# Altium PCB BiasTee.PcbDoc
Units mil, origin at the board's own origin, x right, y up, seen from the top; angles counter-clockwise.
Board outline 2065 x 2450 mil, 2 copper layers (Top Layer, Bottom Layer); 22 components, 12 nets, 58 pads, 225 vias.
Unrouted connection lines stored in the file: 2.
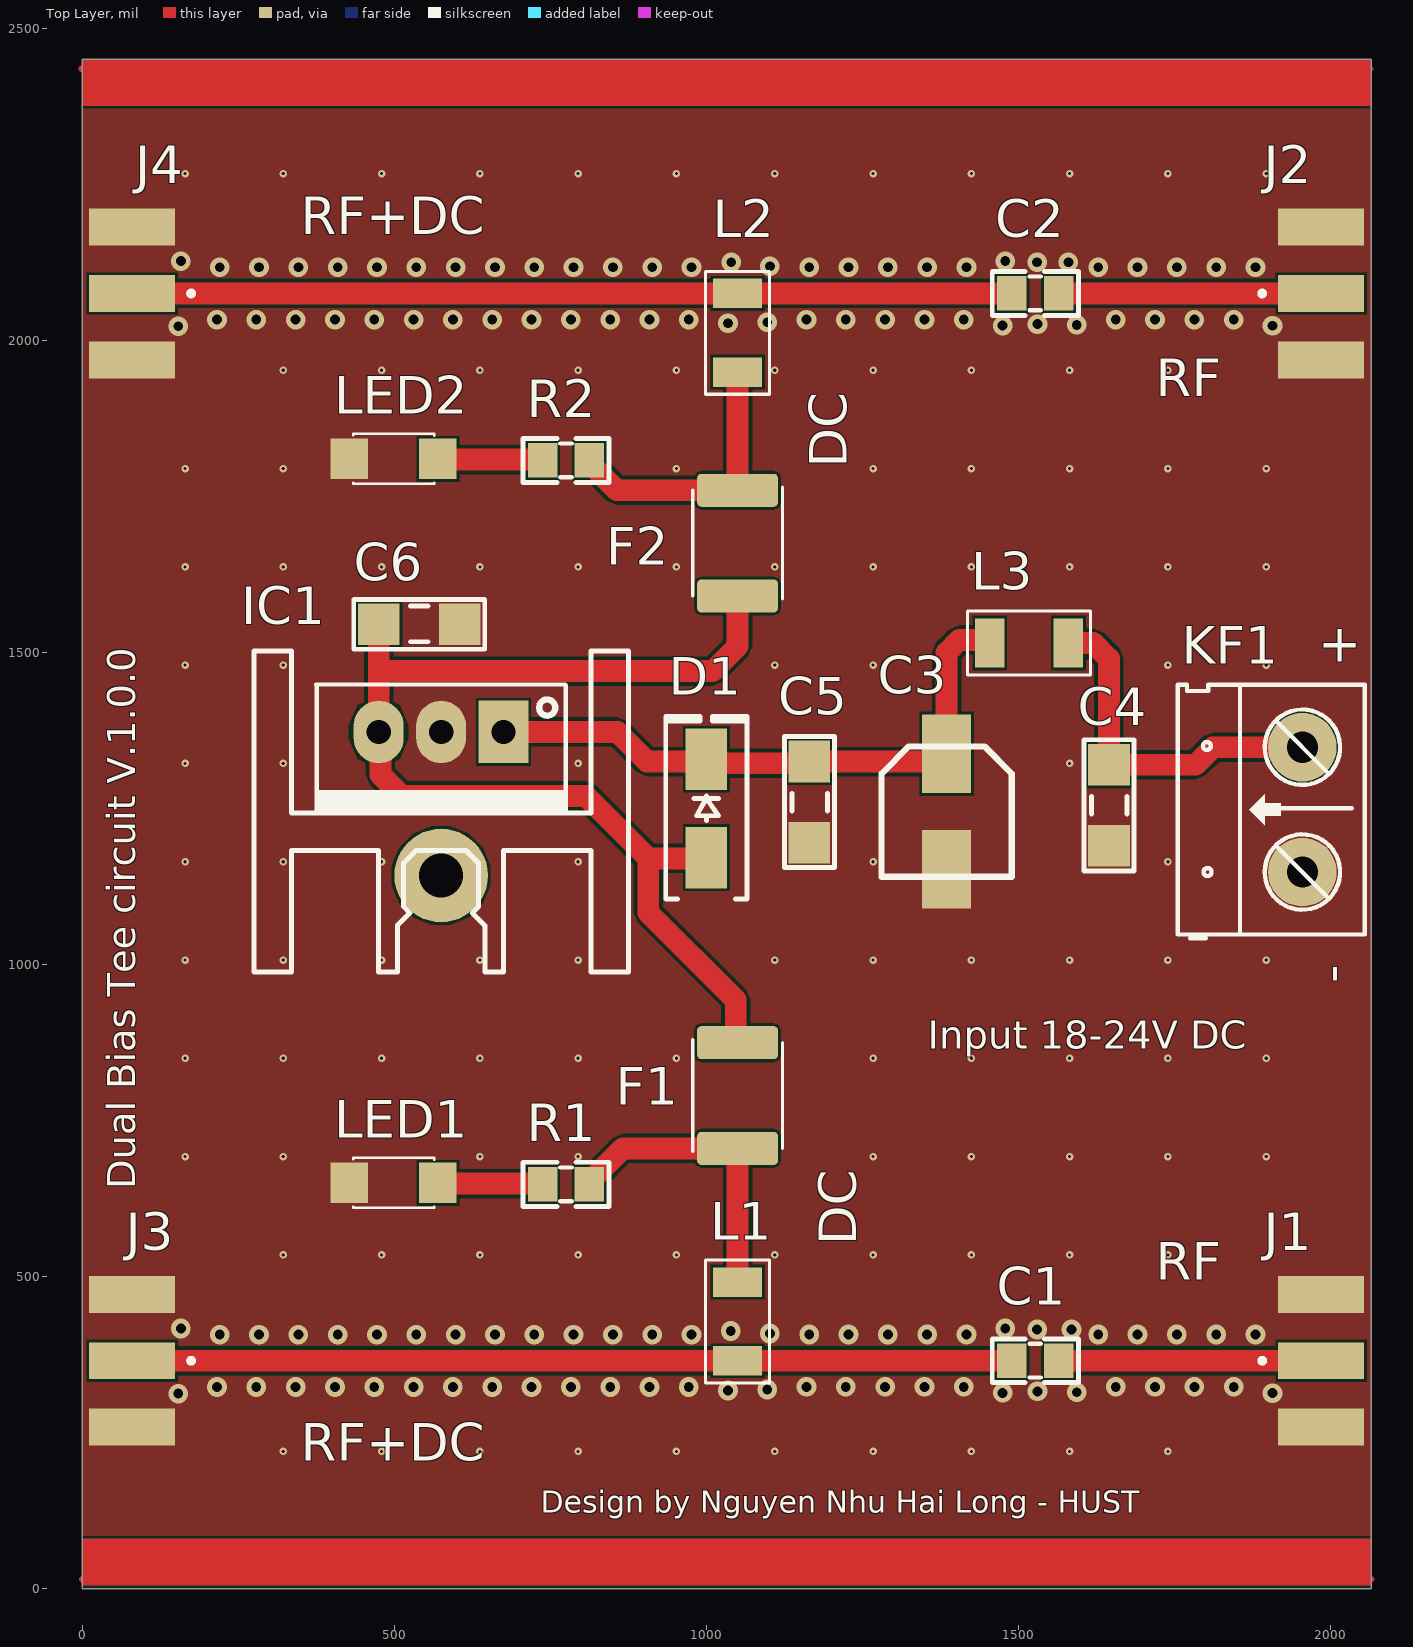
[diagram p0: Top Layer view]
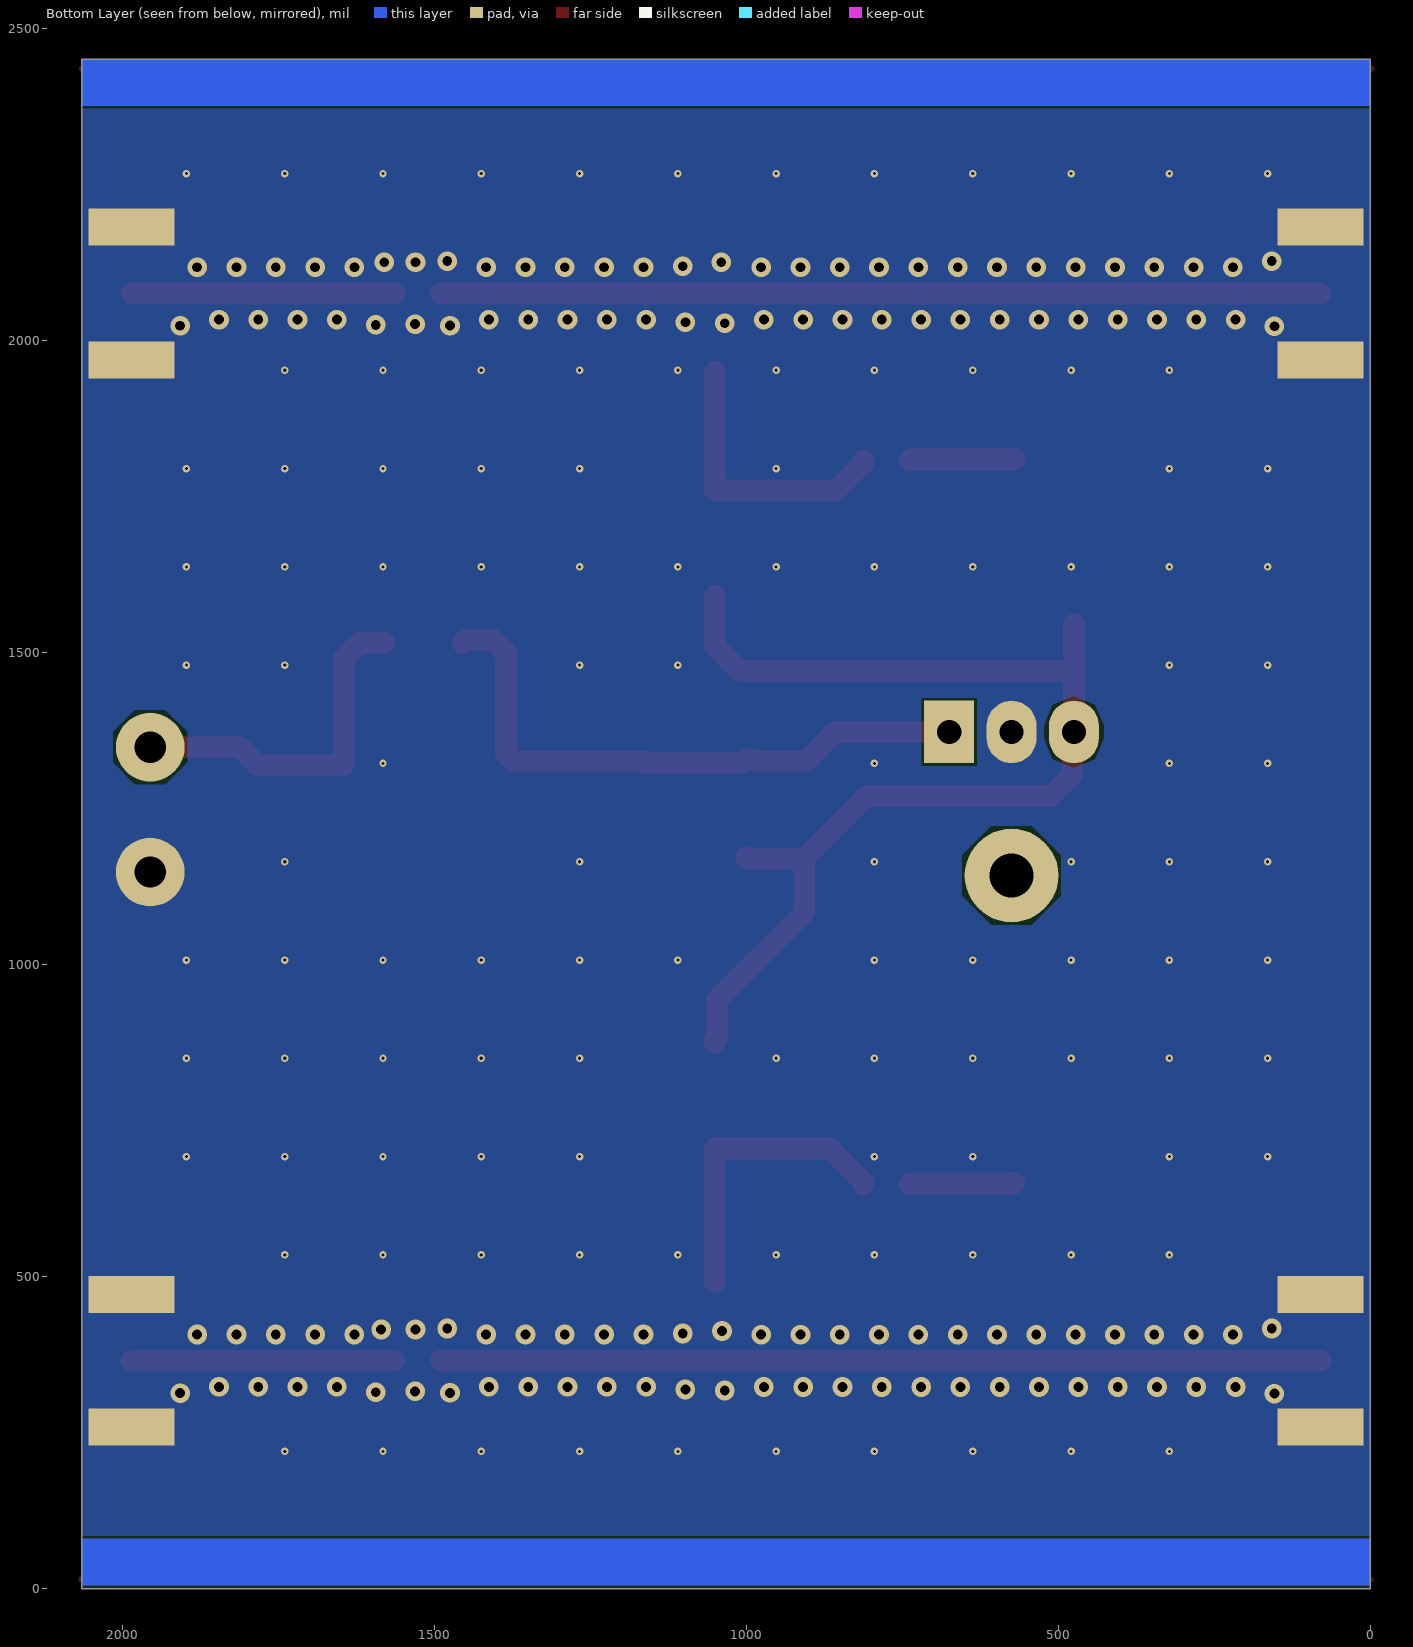
[diagram p1: Bottom Layer view, seen from below]
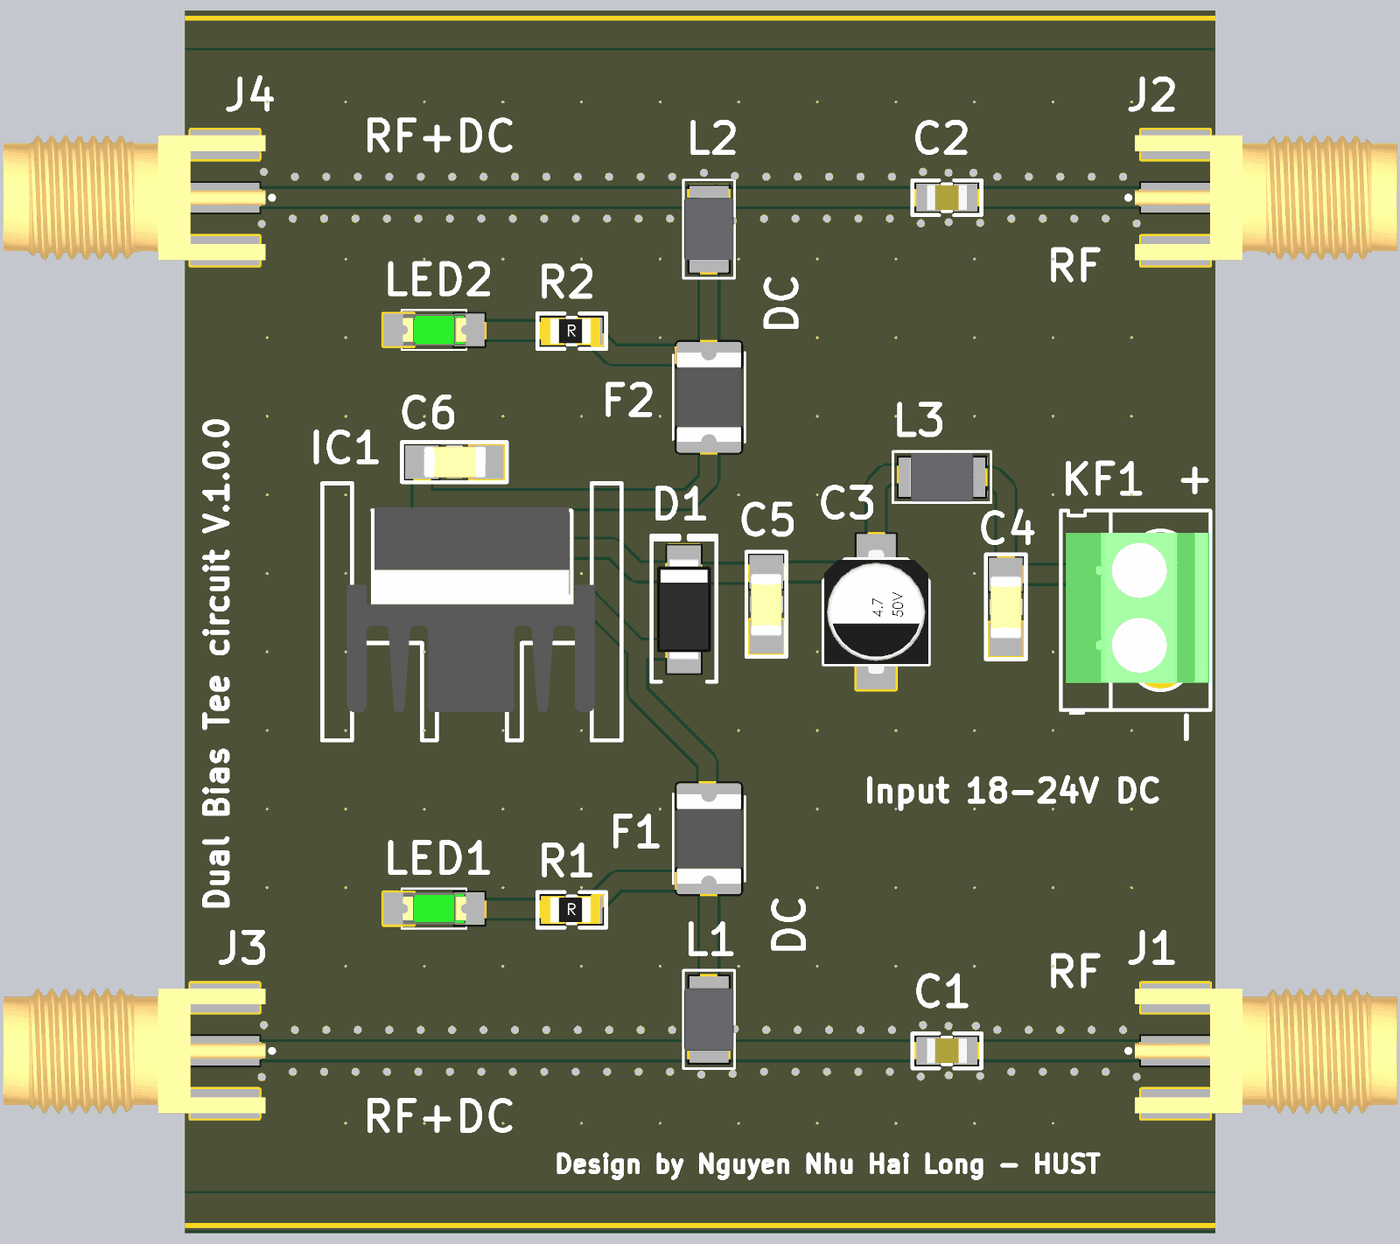
[diagram p2: 3D render of the assembled board from above, using the file's embedded part models]

## Layer stack, top to bottom
Top Solder: solder mask 0.4, Solder Resist, Dk 3.5
Top Layer: signal copper 1.4
Dielectric 1: dielectric 12.6, FR-4, Dk 4.8
Bottom Layer: signal copper 1.4
Bottom Solder: solder mask 0.4, Solder Resist, Dk 3.5

## Board outline
0,0 2065,0 2065,2450 0,2450

## Design rules (kind name [scope] priority, off if disabled: settings)
Clearance [All] p1: gap=3.94 ignorepadtopadclearanceinfootprint=FALSE
PolygonConnect [All] p1: connectstyle=Direct reliefconductorwidth=10 reliefentries=4 polygonreliefangle="90 Angle" airgapwidth=10
RoutingVias [All] p1: holewidth=25 width=50 viastyle="Through Hole" minholewidth=3.94 minwidth=50 maxholewidth=25 maxwidth=78.74
SolderMaskExpansion [All] p1: expansion=4 istentingtop=FALSE
Width [All] p1: maxlimit=35 minlimit=10 preferedwidth=20
30 further rules are at their usual default settings.

## Components (designator, comment, footprint, x,y, rotation, side; value= is the part's Value field where it differs from the comment)
C1 "101" "tu 0805" 1527.01,365 r180 top
C2 "101" "tu 0805" 1527.01,2075 r180 top
C3 "10uF" "tu nhom 5 (c)" 1385,1245 r270 top
C4 "103" "tu 1206" 1645,1255 r270 top
C5 "330" "tu 1206" 1165,1260 r270 top
C6 "104" "tu 1206" 540,1545 r0 top
D1 "SS34" "DIODE SMA" 1000,1250 r90 top
F1 "0.5A 15V" "Cau chi tu phuc hoi 2A 24V SMD1812" 1050,790 r90 top
F2 "0.5A 15V" "Cau chi tu phuc hoi 2A 24V SMD1812" 1050,1675 r270 top
IC1 "LM78xx" TO220H1 575,1372.5 r180 top
J1 "SMA" RFSOLUTIONS_CON-SMA-EDGE-S 1985,365 r180 top
J2 "SMA" RFSOLUTIONS_CON-SMA-EDGE-S 1985,2075 r180 top
J3 "SMA" RFSOLUTIONS_CON-SMA-EDGE-S 80,365 r0 top
J4 "SMA" RFSOLUTIONS_CON-SMA-EDGE-S 80,2075 r0 top
KF1 "CON 2 KF301" "Con 2 KF301 5.08" 1955,1148 r90 top
L1 "47uH SMD\" IND_1210 1050,365 r90 top
L2 "47uH SMD\" IND_1210 1050,2075 r270 top
L3 "47uH SMD\" IND_1210 1580,1515 r180 top
LED1 "LED" LED-1206-Green 570,650.06 r180 top value="LED 3 - 5 ly 2 Colour"
LED2 "LED" LED-1206-Green 570,1810 r180 top value="LED 3 - 5 ly 2 Colour"
R1 "2k" "tro smd 0805" 775,650 r0 top
R2 "2k" "tro smd 0805" 775,1809.94 r0 top

## Footprints (in the part's own frame and the unit in brackets; to place one, negate y for a bottom-side part, rotate by r counter-clockwise, add the part's x,y. Pads: shape width x height; smd on the part's side, far side on the other; paste and mask are expansions set on the pad)
"Cau chi tu phuc hoi 2A 24V SMD1812" [mm]
  rrect25% 1.34x3.29 smd: 1(-2.15,0) 2(2.15,0)
  silkscreen extent -2.28,-1.83 2.28,1.83, body extent -2.27,-1.62 2.27,1.62, height 1.25
"Con 2 KF301 5.08" [mil]
  round 110 hole 50: 1(0,0) 2(200,0)
  silkscreen extent -106,-100 300,200, body extent -45,-97 255,190, height 335
"DIODE SMA" [mm] "SMA"
  rect 2.5x1.7 smd: 1(-2,0) 2(2,0)
  silkscreen extent -3.68,-1.65 3.75,1.65, body extent -2.6,-1.37 2.6,1.37, height 2.4
IND_1210 [mm] "Inductor"
  rect 1.2x2 smd: 1(0,0) 2(3.2,0)
  silkscreen extent -0.9,-1.3 4.1,1.3, body extent 0,-1.25 3.2,1.25, height 1.99
LED-1206-Green [mil]
  rect 60x65 smd: 1(0,0) 2(142,0)
  silkscreen extent 6,-40 136,40, body extent 7,-31 133,32, height 43
RFSOLUTIONS_CON-SMA-EDGE-S [mm]
  rect 3.5x1.5 smd: 1(0,0) G1(0,2.7) G2(0,-2.7)
  rect 3.5x1.5 smd far side: G3(0,2.7) G4(0,-2.7)
  silkscreen extent 2.3,-0.1 2.5,0.1, body extent -11.27,-3.18 2.06,3.18, height 3.55
TO220H1 [mil] "TO-220 - 1-2-3"
  round 150 hole 70: 0(0,230)
  rect 80x100 hole 39: 1(-100,0)
  oval 80x100 hole 39: 2(0,0) 3(100,0)
  silkscreen extent -300,-130 300,385, body extent -246,-82 250,329, height 1000
"tro smd 0805" [mm]
  rect 1.2x1.4 smd: 1(-0.946,-0.061) 2(0.954,-0.061)
  silkscreen extent -1.75,-0.97 1.75,0.84, body extent -1.56,-0.76 1.44,0.64, height 0.53
"tu 0805" [mm]
  rect 1.2x1.4 smd: 1(-0.946,-0.003) 2(0.954,-0.003)
  silkscreen extent -1.75,-0.89 1.75,0.89, body extent -1.01,-0.64 1.01,0.63, height 0.61
"tu 1206" [mm]
  rect 1.7x1.7 smd: 1(-1.65,0) 2(1.65,0)
  silkscreen extent -2.67,-1.02 2.67,1.02, body extent -1.57,-0.8 1.63,0.8, height 0.94
"tu nhom 5 (c)" [mm]
  rect 3.2x2 smd: 1(-2.35,0) 2(2.35,0)
  silkscreen extent -2.65,-2.65 2.65,2.65, body extent -3.15,-2.65 3.15,2.65, height 5.7

## Part data
C1 C2: library part "Tu 0805 101 50V 20%", "Dán", Chung_Loai=Dán, Don_Vi=Con, Ma_Hang=MH002806, So_Chan=2, Ten_Linh_Kien="Tụ 0805 101-0.1nF 50V 20%"
C3: library part "Tu Nhom 10uF 20V", "Dán", Chung_Loai=Dán, Don_Vi=Con, Ma_Hang=MH004016, So_Chan=2, Ten_Linh_Kien="Tụ Nhôm 10uF 20V"
C4 C5 C6: library part "Tu 1206 103 50V 10%", "Dán", Chung_Loai=Dán, Don_Vi=Con, Ma_Hang=MH004543, So_Chan=2, Ten_Linh_Kien="Tụ 1206 103-10nF 10% 50V"
D1: library part "Diode SS34 ( 1N5822 )", "Dán", Chung_Loai=Dán, Don_Vi=Con, Ma_Hang=MH002104, Ten_Linh_Kien="Diode SS34 3A 40V SMA ( 1N5822 SS34A)"
F1 F2: library part "Cau chi tu phuc hoi 2A 24V SMD1812", "2A 24V SMD1812", Ma_Hang=MH010033, Ten="Cầu Chì Tự Phục Hồi 2A 24V SMD1812"
IC1: "Positive Voltage Regulator", ComponentLink1Description="Manufacturer Link", ComponentLink1URL=http://www.st.com/, ComponentLink2Description=Datasheet, ComponentLink2URL=http://www.st.com/stonline/products/literature/ds/2146/l78m05c.pdf, DatasheetVersion=Apr-1994, LatestRevisionDate=17-Jul-2002, LatestRevisionNote="Re-released for DXP Platform.", Note="Tab is connected to pin 3 (GND).", PackageDescription="TO, Thru-Hole, Vertical, Heatsink Mounted; 3 In-Line Leads; Pitch 2.54 mm; Pin sequence 1, 3, 2", PackageReference=ISOWATT220AB, PackageVersion=Jul-1998, Published=24-Aug-2001, Publisher="Altium Limited"
J1 J2 J3 J4: library part CON-SMA-EDGE-S, "SMA Connector Jack, Female Socket - Board Edge, End Launch Solder", Package=None, Check_prices=https://www.snapeda.com/parts/CON-SMA-EDGE-S/RF+Solutions/view-part/?ref=eda, Digi-Key_Part_Number=CON-SMA-EDGE-S-ND, MF="RF Solutions", MP=CON-SMA-EDGE-S, Purchase-URL=https://pricing.snapeda.com/search/part/CON-SMA-EDGE-S/?ref=eda, SnapEDA_Link=https://www.snapeda.com/parts/CON-SMA-EDGE-S/RF+Solutions/view-part/?ref=snap
KF1: "Cắm", Chung_Loai=Cắm, Don_Vi=Con, Ma_Hang=MH000987, Ten_Linh_Kien="CON 2 KF301-2P 5.08MM Xanh Dương"
L1 L2 L3: library part IND_18uH-0.12A-10%-SMD, "Fixed Inductors 18uH 10% 2.52MHz", Alternate Part Number-1=NA, Case/Package=SMD, Manufacturer="Wurth Electronics", Manufacturer Part Number=CMH322522-180KL, Supplier Part Number-1=CMH322522-180KL, Supplier-1=ARROW
LED1 LED2: library part "LED SMD"
R1 R2: library part "Tro 0805 1% 2k", "Dán", Chung_Loai=Dán, Don_Vi=Con, Ma_Hang=MH005471, So_Chan=2, Ten_Linh_Kien="Trở 0805 1% 2k"

## Via types
v1: diameter 31.5, hole 15.75, Top Layer to Bottom Layer, tented both sides, 116 vias
v2: diameter 12, hole 5, Top Layer to Bottom Layer, tented both sides, 109 vias

## Nets (pads, with @x,y where several pads share a name; then routed paths per layer and width w, separated by ;. In a path a pad name is that pad's centre, name@x,y a point inside that pad or via, vN(x,y) a via of type N, cw(c..) or ccw(c..) an arc to the next point about the centre after c; other vN are vias at no path point)
15V: C6.1 D1.1 F1.2 F2.2 IC1.3 | length 1846.7
  Top Layer w35: C6.1 475.02,1470 ; D1.1 998.74,1170 907.01,1170 ; F1.2 1050,880.5 1046.98,883.52 1046.98,943.02 907.01,1082.99 907.01,1170 ; F2.2 1050,1510 1010,1470 475.02,1470 ; 475.02,1470 IC1.3 477.69,1369.81 477.69,1304.37 512.06,1270 807.01,1270 907.01,1170
GND: C3.2 C4.2 C5.2 C6.2 IC1.2 J1.G1 J1.G2 J1.G3 J1.G4 J2.G1 J2.G2 J2.G3 J2.G4 J3.G1 J3.G2 J3.G3 J3.G4 J4.G1 J4.G2 J4.G3 J4.G4 KF1.1 LED1.2 LED2.2 | length 4130
  Top Layer w10: -1.26,2435 2063.74,2435 ; 0.24,15 2065.24,15
  other v1: 153.89,312.38 1474.64,313.49 1907.12,313.17 1593.53,314.62 1530.55,315.89 1034.6,317.29 1097.58,318.93 215.97,323.07 278.96,323.07 341.96,323.07 404.95,323.07 467.94,323.07 530.93,323.07 593.92,323.07 656.92,323.07 719.91,323.07 782.9,323.07 845.89,323.07 908.89,323.07 971.88,323.07 1160.43,323.14 1223.42,323.14 1286.41,323.14 1349.4,323.14 1412.4,323.14 1655.95,323.14 1718.94,323.14 1781.93,323.14 1844.92,323.14 220.33,406.93 283.32,406.93 346.32,406.93 409.31,406.93 472.3,406.93 535.29,406.93 598.29,406.93 661.28,406.93 724.27,406.93 787.26,406.93 850.25,406.93 913.25,406.93 976.24,406.93 1164.8,407 1227.79,407 1290.78,407 1353.78,407 1416.77,407 1627.84,407 1690.84,407 1753.83,407 1816.82,407 1879.81,407 1101.83,408.71 1038.97,412.71 1530,415 1585,415 158.12,416.78 1479,416.78 153.89,2022.38 1474.64,2023.49 1907.12,2023.17 1593.53,2024.62 1530.55,2025.89 1034.6,2027.29 1097.58,2028.93 215.97,2033.07 278.96,2033.07 341.96,2033.07 404.95,2033.07 467.94,2033.07 530.93,2033.07 593.92,2033.07 656.92,2033.07 719.91,2033.07 782.9,2033.07 845.89,2033.07 908.89,2033.07 971.88,2033.07 1160.43,2033.14 1223.42,2033.14 1286.41,2033.14 1349.4,2033.14 1412.4,2033.14 1655.95,2033.14 1718.94,2033.14 1781.93,2033.14 1844.92,2033.14 220.33,2116.93 283.32,2116.93 346.32,2116.93 409.31,2116.93 472.3,2116.93 535.29,2116.93 598.29,2116.93 661.28,2116.93 724.27,2116.93 787.26,2116.93 850.25,2116.93 913.25,2116.93 976.24,2116.93 1164.8,2116.99 1227.79,2116.99 1290.78,2116.99 1353.78,2116.99 1416.77,2116.99 1627.84,2116.99 1690.84,2116.99 1753.83,2116.99 1816.82,2116.99 1879.81,2116.99 1101.83,2118.71 1040,2125 1530,2125 1580,2125 158.12,2126.78 1479,2126.78
  other v2: 322.2,219.69 479.69,219.69 637.17,219.69 794.65,219.69 952.13,219.69 1109.61,219.69 1267.09,219.69 1424.57,219.69 1582.05,219.69 1739.53,219.69 322.2,534.65 479.69,534.65 637.17,534.65 794.65,534.65 952.13,534.65 1109.61,534.65 1267.09,534.65 1424.57,534.65 1582.05,534.65 1739.53,534.65 164.72,692.13 322.2,692.13 637.17,692.13 794.65,692.13 1267.09,692.13 1424.57,692.13 1582.05,692.13 1739.53,692.13 1897.01,692.13 164.72,849.61 322.2,849.61 479.69,849.61 637.17,849.61 794.65,849.61 952.13,849.61 1267.09,849.61 1424.57,849.61 1582.05,849.61 1739.53,849.61 1897.01,849.61 164.72,1007.09 322.2,1007.09 479.69,1007.09 637.17,1007.09 794.65,1007.09 1109.61,1007.09 1267.09,1007.09 1424.57,1007.09 1582.05,1007.09 1739.53,1007.09 1897.01,1007.09 164.72,1164.57 322.2,1164.57 479.69,1164.57 794.65,1164.57 1267.09,1164.57 1739.53,1164.57 164.72,1322.05 322.2,1322.05 794.65,1322.05 1582.05,1322.05 164.72,1479.53 322.2,1479.53 1109.61,1479.53 1267.09,1479.53 1739.53,1479.53 1897.01,1479.53 164.72,1637.01 322.2,1637.01 479.69,1637.01 637.17,1637.01 794.65,1637.01 952.13,1637.01 1109.61,1637.01 1267.09,1637.01 1424.57,1637.01 1582.05,1637.01 1739.53,1637.01 1897.01,1637.01 164.72,1794.49 322.2,1794.49 952.13,1794.49 1267.09,1794.49 1424.57,1794.49 1582.05,1794.49 1739.53,1794.49 1897.01,1794.49 322.2,1951.97 479.69,1951.97 637.17,1951.97 794.65,1951.97 952.13,1951.97 1109.61,1951.97 1267.09,1951.97 1424.57,1951.97 1582.05,1951.97 1739.53,1951.97 164.72,2266.93 322.2,2266.93 479.69,2266.93 637.17,2266.93 794.65,2266.93 952.13,2266.93 1109.61,2266.93 1267.09,2266.93 1424.57,2266.93 1582.05,2266.93 1739.53,2266.93 1897.01,2266.93
NetC1_1: C1.1 J1.1 | length 420.6
  Top Layer w35: C1.1@1564.3,365.07 J1.1@1984.93,365.07
NetC1_2: C1.2 J3.1 L1.1 | length 1409.3
  Top Layer w35: J3.1 L1.1 ; L1.1@1050.07,365.07 C1.2
NetC2_1: C2.1 J2.1 | length 420.6
  Top Layer w35: C2.1@1564.3,2075.07 J2.1@1984.93,2075.07
NetC2_2: C2.2 J4.1 L2.1 | length 1409.3
  Top Layer w35: J4.1 L2.1 ; L2.1@1050.07,2075.07 C2.2
NetC3_1: C3.1 C5.1 D1.2 IC1.1 L3.2 | length 981.8
  Top Layer w35: IC1.1 857.5,1372.5 905,1325 984.04,1325 987.78,1328.74 D1.2 1006.52,1322.22 1162.26,1322.22 C5.1 1372.44,1324.96 C3.1 1385,1499.5 1405.5,1520 1449.02,1520 L3.2
NetC4_1: C4.1 KF1.2 L3.1 | length 567
  Top Layer w35: L3.1 1620,1515 1645,1490 C4.1 1783.82,1319.96 1811.86,1348 KF1.2
NetF1_1: F1.1 L1.2 R1.2 | length 478
  Top Layer w35: R1.2 812.58,651.54 866.39,705.35 F1.1 L1.2
NetF2_1: F2.1 L2.2 R2.2 | length 448.9
  Top Layer w35: R2.2 812.58,1803.61 856.54,1759.65 F2.1 L2.2
NetLED1_1: LED1.1 R1.1 | length 168.8
  Top Layer w35: LED1.1 571.23,648.84 736.54,648.84 R1.1
NetLED2_1: LED2.1 R2.1 | length 168.8
  Top Layer w35: LED2.1 571.23,1808.77 736.54,1808.77 R2.1
pads on no net: IC1.0

## Polygon pours and split planes (outlines as drawn)
GND on Top Layer "GND_L01_P001" (solid, pour order 1): 0,2455 2065,2455 2065,5 0,5
GND on Bottom Layer "GND_L02_P000" (solid, pour order 0): 0,2450 2065,2450 2065,5 0,5

## Other copper
Top Layer:
  rectangle net GND: 0,5 2065,80
  rectangle net GND: 0,2375 2065,2450
Bottom Layer:
  rectangle net GND: 0,5 2065,80
  rectangle net GND: 0,2375 2065,2450

## Silkscreen, mask and mechanical layers (free items; w line width, h text height)
Top Overlay:
  text "RF+DC" at 350,2170 h60
  text "RF" at 1720,1910 h60
  text "DC" at 1225,1795.83 h60 r90
  text "+" at 1980,1485 h60
  text "-" at 2029.99,970 h60 r90
  text "Input 18-24V DC" at 1355,865 h45
  text "Dual Bias Tee circuit V.1.0.0" at 85,640 h45 r90
  text "DC" at 1240,550 h60 r90
  text "RF" at 1720,495 h60
  text "RF+DC" at 350,205 h60
  text "Design by Nguyen Nhu Hai Long - HUST" at 735,121.66 h35

## Dimensions
0,2455 to 2065,2455 on Top Overlay